# EAGLE board QuadHybridV1 (EAGLE 6.1)
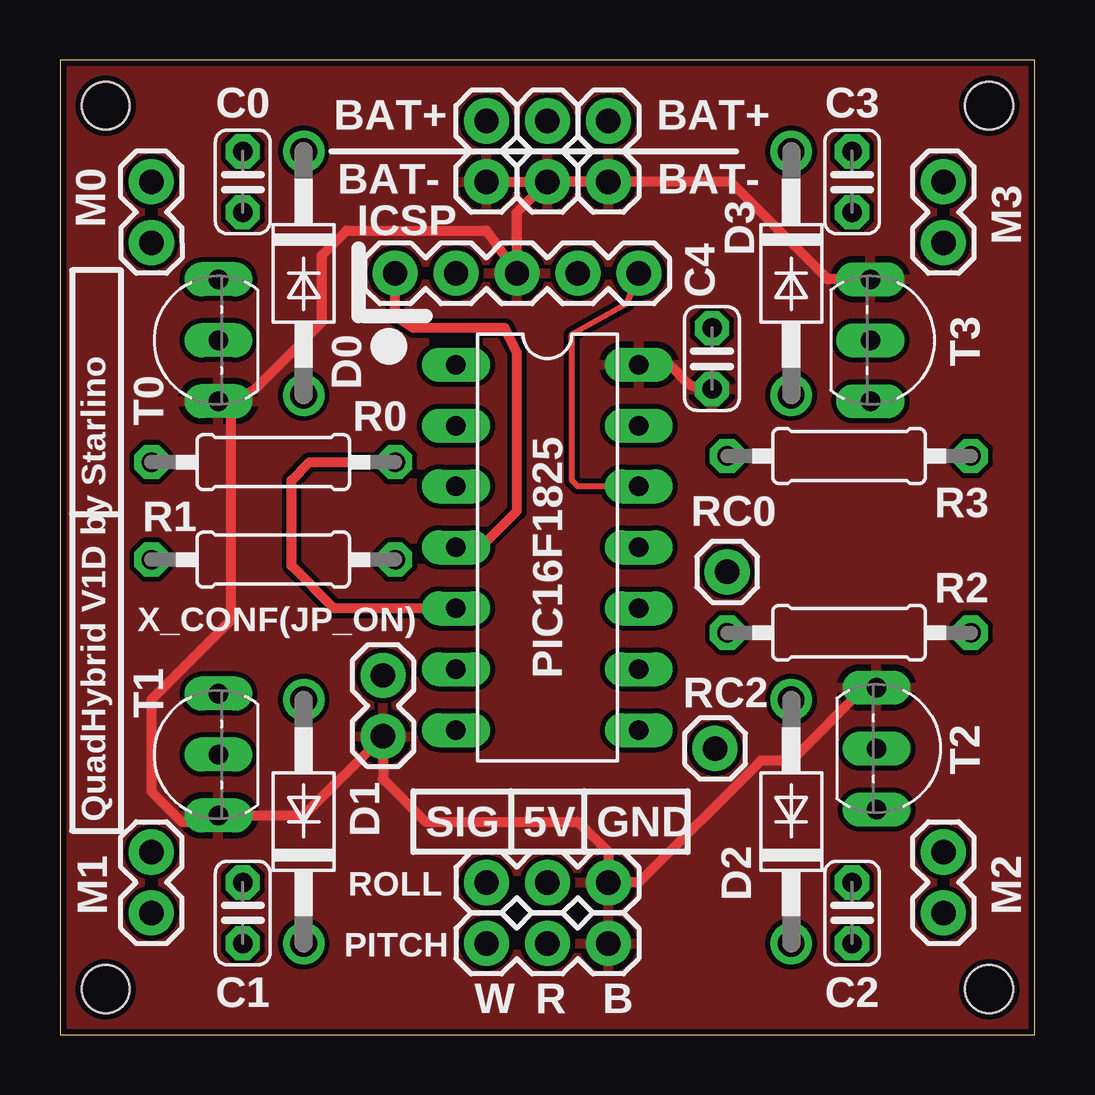
[diagram p0: board, top side]
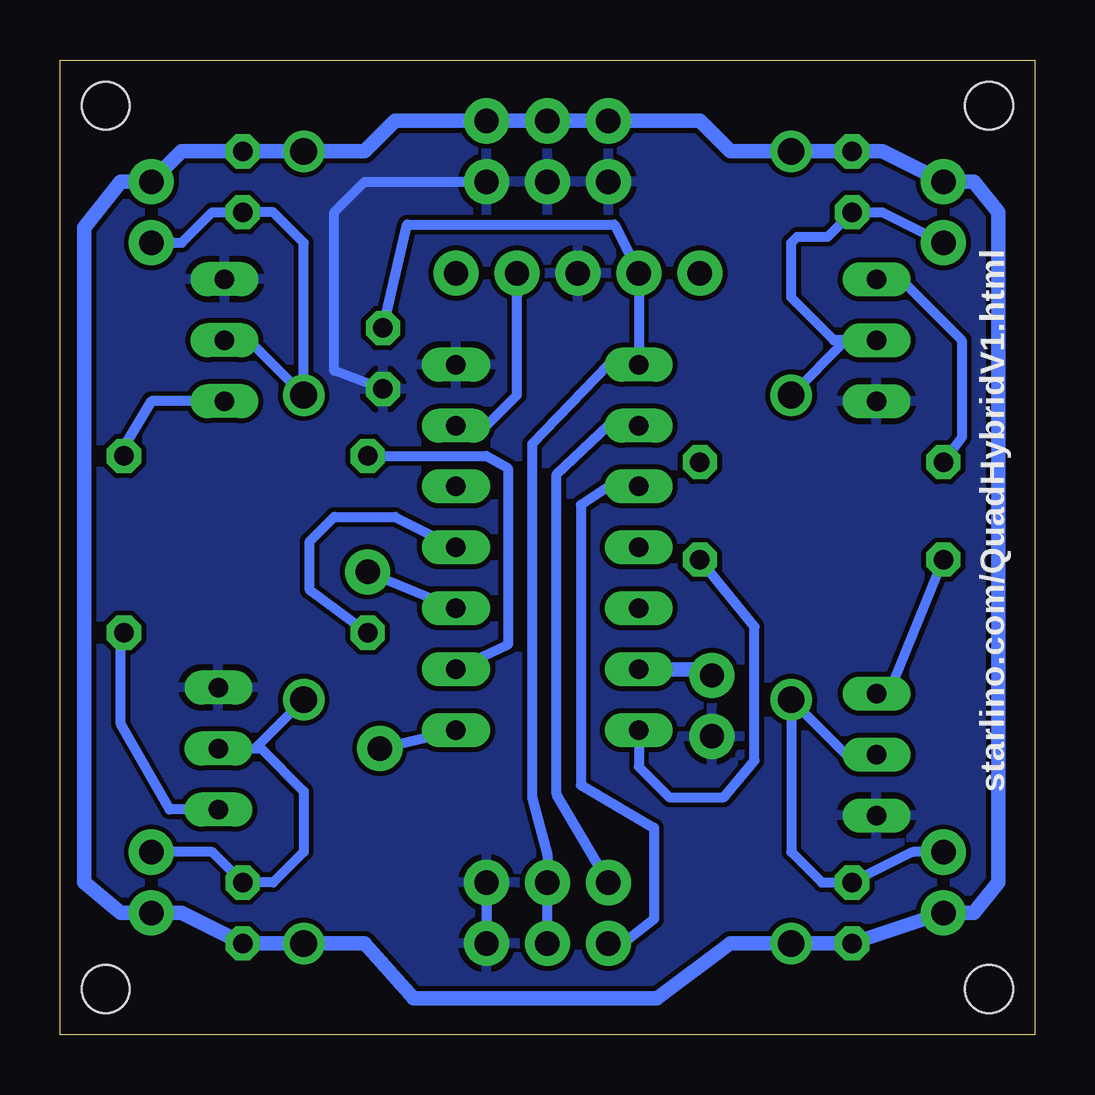
[diagram p1: board, bottom side, seen from below]

Size 40.64 x 40.64 mm. Coordinates in mm from the lower left corner, seen from the top.
Outline: 0,0 40.64,0 40.64,40.64 0,40.64 0,0
Copper layers (1*16): Top 0.035mm / dielectric 1.5mm / Bottom 0.035mm
Design rules: minimum track width 8mil, minimum drill 20mil, track to track 8mil, track to pad 8mil, pad to pad 8mil, via to via 8mil, smd to smd 8mil, copper to edge 10mil, drill to drill 8mil, minimum pad ring 12mil, minimum via ring 10mil, stop-mask expansion 4mil, vias tented up to drill 25mil, thermal gap 10mil
Holes 2 mm at 1.91,38.73 38.73,38.73 38.73,1.91 1.91,1.91

## Footprints (pad centres in the part's own frame; a part is rotated, then mirrored left to right if it is on the bottom)
C025-024X044 = drill 0.813 octagon: 1 -1.27,0; 2 1.27,0
DO41-10 = drill 1.118: A 5.08,0; C -5.08,0
1X05 = drill 1.016 pad 1.88: 1 0,0; 2 2.54,0; 3 5.08,0; 4 7.62,0; 5 10.16,0
1X02 = drill 1.016 pad 1.88: 1 0,0; 2 2.54,0
DIL14 = drill 0.813 long: 1 -7.62,-3.81; 2 -5.08,-3.81; 3 -2.54,-3.81; 4 0,-3.81; 5 2.54,-3.81; 6 5.08,-3.81; 7 7.62,-3.81; 8 7.62,3.81; 9 5.08,3.81; 10 2.54,3.81; 11 0,3.81; 12 -2.54,3.81; 13 -5.08,3.81; 14 -7.62,3.81
1X03 = drill 1.016 pad 1.88: 1 0,0; 2 2.54,0; 3 5.08,0
0207/10 = drill 0.813 octagon: 1 -5.08,0; 2 5.08,0
1X01 = drill 1.016 pad 1.88: 1 0,0
TO92-ECB = drill 0.813 long: B 2.54,0; C 0,0; E -2.54,0

## Placement (x,y rotation side)
C0  [C025-024X044]  7.62,35.56 270 top
C1  [C025-024X044]  7.62,5.08 90 top
C2  [C025-024X044]  33.02,5.08 90 top
C3  [C025-024X044]  33.02,35.56 270 top
C4  [C025-024X044]  27.18,28.19 270 top
D0  1N4004  [DO41-10]  10.16,31.75 270 top
D1  1N4004  [DO41-10]  10.16,8.89 90 top
D2  1N4004  [DO41-10]  30.48,8.89 90 top
D3  1N4004  [DO41-10]  30.48,31.75 270 top
ICSP  [1X05]  13.97,31.75 0 top
JP1  [1X02]  17.78,38.1 270 top
JP2  [1X02]  20.32,38.1 270 top
JP3  [1X02]  22.86,38.1 270 top
M0  MOTOR  [1X02]  3.81,35.56 270.1 top
M1  MOTOR  [1X02]  3.81,5.08 90 top
M2  MOTOR  [1X02]  36.83,5.08 90 top
M3  MOTOR  [1X02]  36.83,35.56 270 top
PIC16F1825  PIC16F1825PDIP  [DIL14]  20.32,20.32 270 top
PITCH  [1X03]  17.78,3.81 0 top
R0  510  [0207/10]  8.89,23.88 0 top
R1  510  [0207/10]  8.89,19.81 0 top
R2  510  [0207/10]  32.89,16.76 180 top
R3  510  [0207/10]  32.89,24.13 180 top
RC0  M01PTH  [1X01]  27.81,19.3 0 top
RC2  M01PTH  [1X01]  27.3,11.94 0 top
ROLL  [1X03]  17.78,6.35 0 top
T0  [TO92-ECB]  6.6,28.96 90 top
T1  [TO92-ECB]  6.6,11.68 90 top
T2  [TO92-ECB]  34.04,11.94 270 top
T3  [TO92-ECB]  33.78,28.96 270 top
X_CONF(JP_ON)  [1X02]  13.46,14.99 270 top

## Library data of the parts
C0 C1-C4 R0 R1-R3 = rcl
D0 D1-D3 = diode
ICSP JP1-JP3 M0 M1-M3 PITCH RC0 RC2 ROLL X_CONF(JP_ON) = SparkFun
PIC16F1825 = PIC16F1825
T0 T1-T3 = transistor

## Nets
+5V: C4.1 ICSP.2 PIC16F1825.1 PITCH.2 ROLL.2
GND: C4.2 ICSP.3 JP1.2 JP2.2 JP3.2 PIC16F1825.14 PITCH.3 ROLL.3 T0.E T1.E T2.E T3.E X_CONF(JP_ON).2
N$1: C0.2 D0.A M0.2 T0.C
N$2: C1.2 D1.A M1.2 T1.C
N$3: PIC16F1825.8 RC2.1
N$4: PIC16F1825.6 X_CONF(JP_ON).1
N$5: C2.2 D2.A M2.2 T2.C
N$6: PIC16F1825.10 RC0.1
N$7: C3.2 D3.A M3.2 T3.C
N$8: R0.1 T0.B
N$9: PIC16F1825.2 ROLL.1
N$10: PIC16F1825.3 PITCH.1
N$11: R1.1 T1.B
N$12: R2.1 T2.B
N$13: R3.1 T3.B
PGC: ICSP.5 PIC16F1825.12
PGD: ICSP.4 PIC16F1825.13
PWM0: PIC16F1825.5 R0.2
PWM1: PIC16F1825.7 R1.2
PWM2: PIC16F1825.11 R2.2
PWM3: PIC16F1825.9 R3.2
V+: C0.1 C1.1 C2.1 C3.1 D0.C D1.C D2.C D3.C JP1.1 JP2.1 JP3.1 M0.1 M1.1 M2.1 M3.1
VPP: ICSP.1 PIC16F1825.4

## Tracks (layer width: path | path; a pad name or v marks a point on that pad's centre or on a via)
+5V
  Bottom 0.406: PITCH.2 ROLL.2 20.32,7.49 20.95,9.91 20.95,24.64 17.78,27.94 PIC16F1825.1 ICSP.2 17.53,33.78 26.16,33.78 C4.1
GND
  Top 0.406: T0.E 7.11,26.42 | 7.11,26.42 8.13,26.92 10.92,29.72 10.92,32.51 11.94,33.53 17.78,33.53 ICSP.3 19.05,34.29 JP2.2 | T2.E 33.53,14.48 30.48,11.43 29.21,11.43 24.13,6.35 ROLL.3 22.86,7.62 21.59,8.89 15.24,8.89 13.46,10.67 X_CONF(JP_ON).2 10.16,9.14 T1.E 6.35,8.89 5.08,8.89 3.81,10.16 3.81,13.97 7.11,17.27 7.11,26.42 | T3.E 32,31.5 27.94,35.56 JP3.2 JP2.2 | PIC16F1825.14 25.4,27.94 26.16,27.18 26.67,26.92 C4.2 | JP1.2 JP2.2
  Bottom 0.406: ROLL.3 PITCH.3 | C4.2 29.21,27.69 29.21,34.29 27.94,35.56 JP3.2
  pour Top: 0,40.64 0,0 40.64,0 40.64,40.64
  pour Bottom: 0,40.64 0,0 40.64,0 40.64,40.64
N$1
  Bottom 0.406: M0.2 6.35,34.29 C0.2 8.64,33.27 9.91,33.27 10.16,33.02 10.16,30.73 8.38,28.96 T0.C 7.87,28.96 D0.A
N$2
  Bottom 0.406: M1.2 5.08,7.62 C1.2 8.89,6.35 10.16,7.62 D1.A 7.87,11.68 T1.C
N$3
  Bottom 0.406: RC2.1 PIC16F1825.8
N$4
  Bottom 0.61: X_CONF(JP_ON).1 13.72,15.24 PIC16F1825.6
N$5
  Bottom 0.406: M2.2 34.29,7.62 C2.2 31.75,6.35 30.48,7.62 30.48,10.16 32.26,11.94 T2.C 32.51,11.94 D2.A
N$6
  Bottom 0.406: RC0.1 PIC16F1825.10
N$7
  Bottom 0.406: M3.2 35.56,33.02 34.29,34.29 C3.2 31.75,34.29 30.48,33.02 D3.A 32.77,28.96 T3.C
N$8
  Bottom 0.406: T0.B 7.37,31.5 7.62,31.75 5.84,31.75 3.05,28.96 3.05,24.89 R0.1
N$9
  Bottom 0.406: ROLL.1 19.94,10.03 19.94,23.37 17.78,25.4 PIC16F1825.2
N$10
  Bottom 0.406: PIC16F1825.3 17.78,22.86 18.92,22.1 18.92,10.41 15.88,8.64 15.88,4.83 17.14,3.81 PITCH.1
N$11
  Bottom 0.406: T1.B 6.1,14.22 R1.1
N$12
  Bottom 0.406: T2.B 36.07,9.4 38.1,12.95 38.1,16.38 R2.1
N$13
  Bottom 0.406: T3.B 36.83,26.42 37.85,24.77 R3.1
PGC
  Top 0.254: ICSP.5 23.62,30.48 21.34,29.21 21.34,23.11 21.59,22.86 PIC16F1825.12
PGD
  Bottom 0.406: PIC16F1825.13 22.86,25.4 21.59,26.67 21.59,30.23 21.59,30.76 ICSP.4
PWM0
  Top 0.406: PIC16F1825.5 11.43,17.78 9.65,19.56 9.65,23.11 10.41,23.88 R0.2
PWM1
  Bottom 0.406: PIC16F1825.7 16.51,11.18 15.24,9.91 12.95,9.91 11.68,11.43 11.68,17.02 R1.2
PWM2
  Bottom 0.406: R2.2 30.23,18.54 30.23,20.57 29.21,21.59 26.67,21.59 PIC16F1825.11
PWM3
  Bottom 0.406: R3.2 22.86,24.13 21.97,23.62 21.97,16.26 PIC16F1825.9
V+
  Bottom 0.61: M3.1 35.56,36.83 C3.1 D3.C 27.94,36.83 26.67,38.1 JP3.1 JP2.1 JP1.1 13.97,38.1 12.7,36.83 D0.C C0.1 6.35,36.83 M0.1 2.54,35.56 1.52,34.29 1.52,6.35 2.54,5.08 M1.1 C1.1 D1.C 12.7,3.81 15.75,1.52 25.91,1.52 27.94,3.81 D2.C C2.1 35.56,5.08 M2.1 38.1,5.08 39.62,6.35 39.62,33.66 38.1,35.56 M3.1
VPP
  Top 0.406: PIC16F1825.4 17.53,20.32 19.05,21.84 19.05,28.45 18.54,29.46 14.73,29.46 13.97,29.97 ICSP.1

## Text on the board
tNames: BAT+ | BAT+ | BAT- | BAT- | M0 | RC0 | QuadHybrid V1D by Starlino | SIG | 5V | GND | W | R | B
bNames: starlino.com/QuadHybridV1.html